# Altium PCB PIPOCPUF_2006.PCBDOC (part 4 of 6)
Units mil, origin at the board's own origin, x right, y up, seen from the top; angles counter-clockwise.
Board outline 8500 x 4525 mil, 2 copper layers (Top Layer, Top, Bottom Layer, Bottom); 345 components, 259 nets, 1116 pads, 603 vias.
Unrouted connection lines stored in the file: 781.
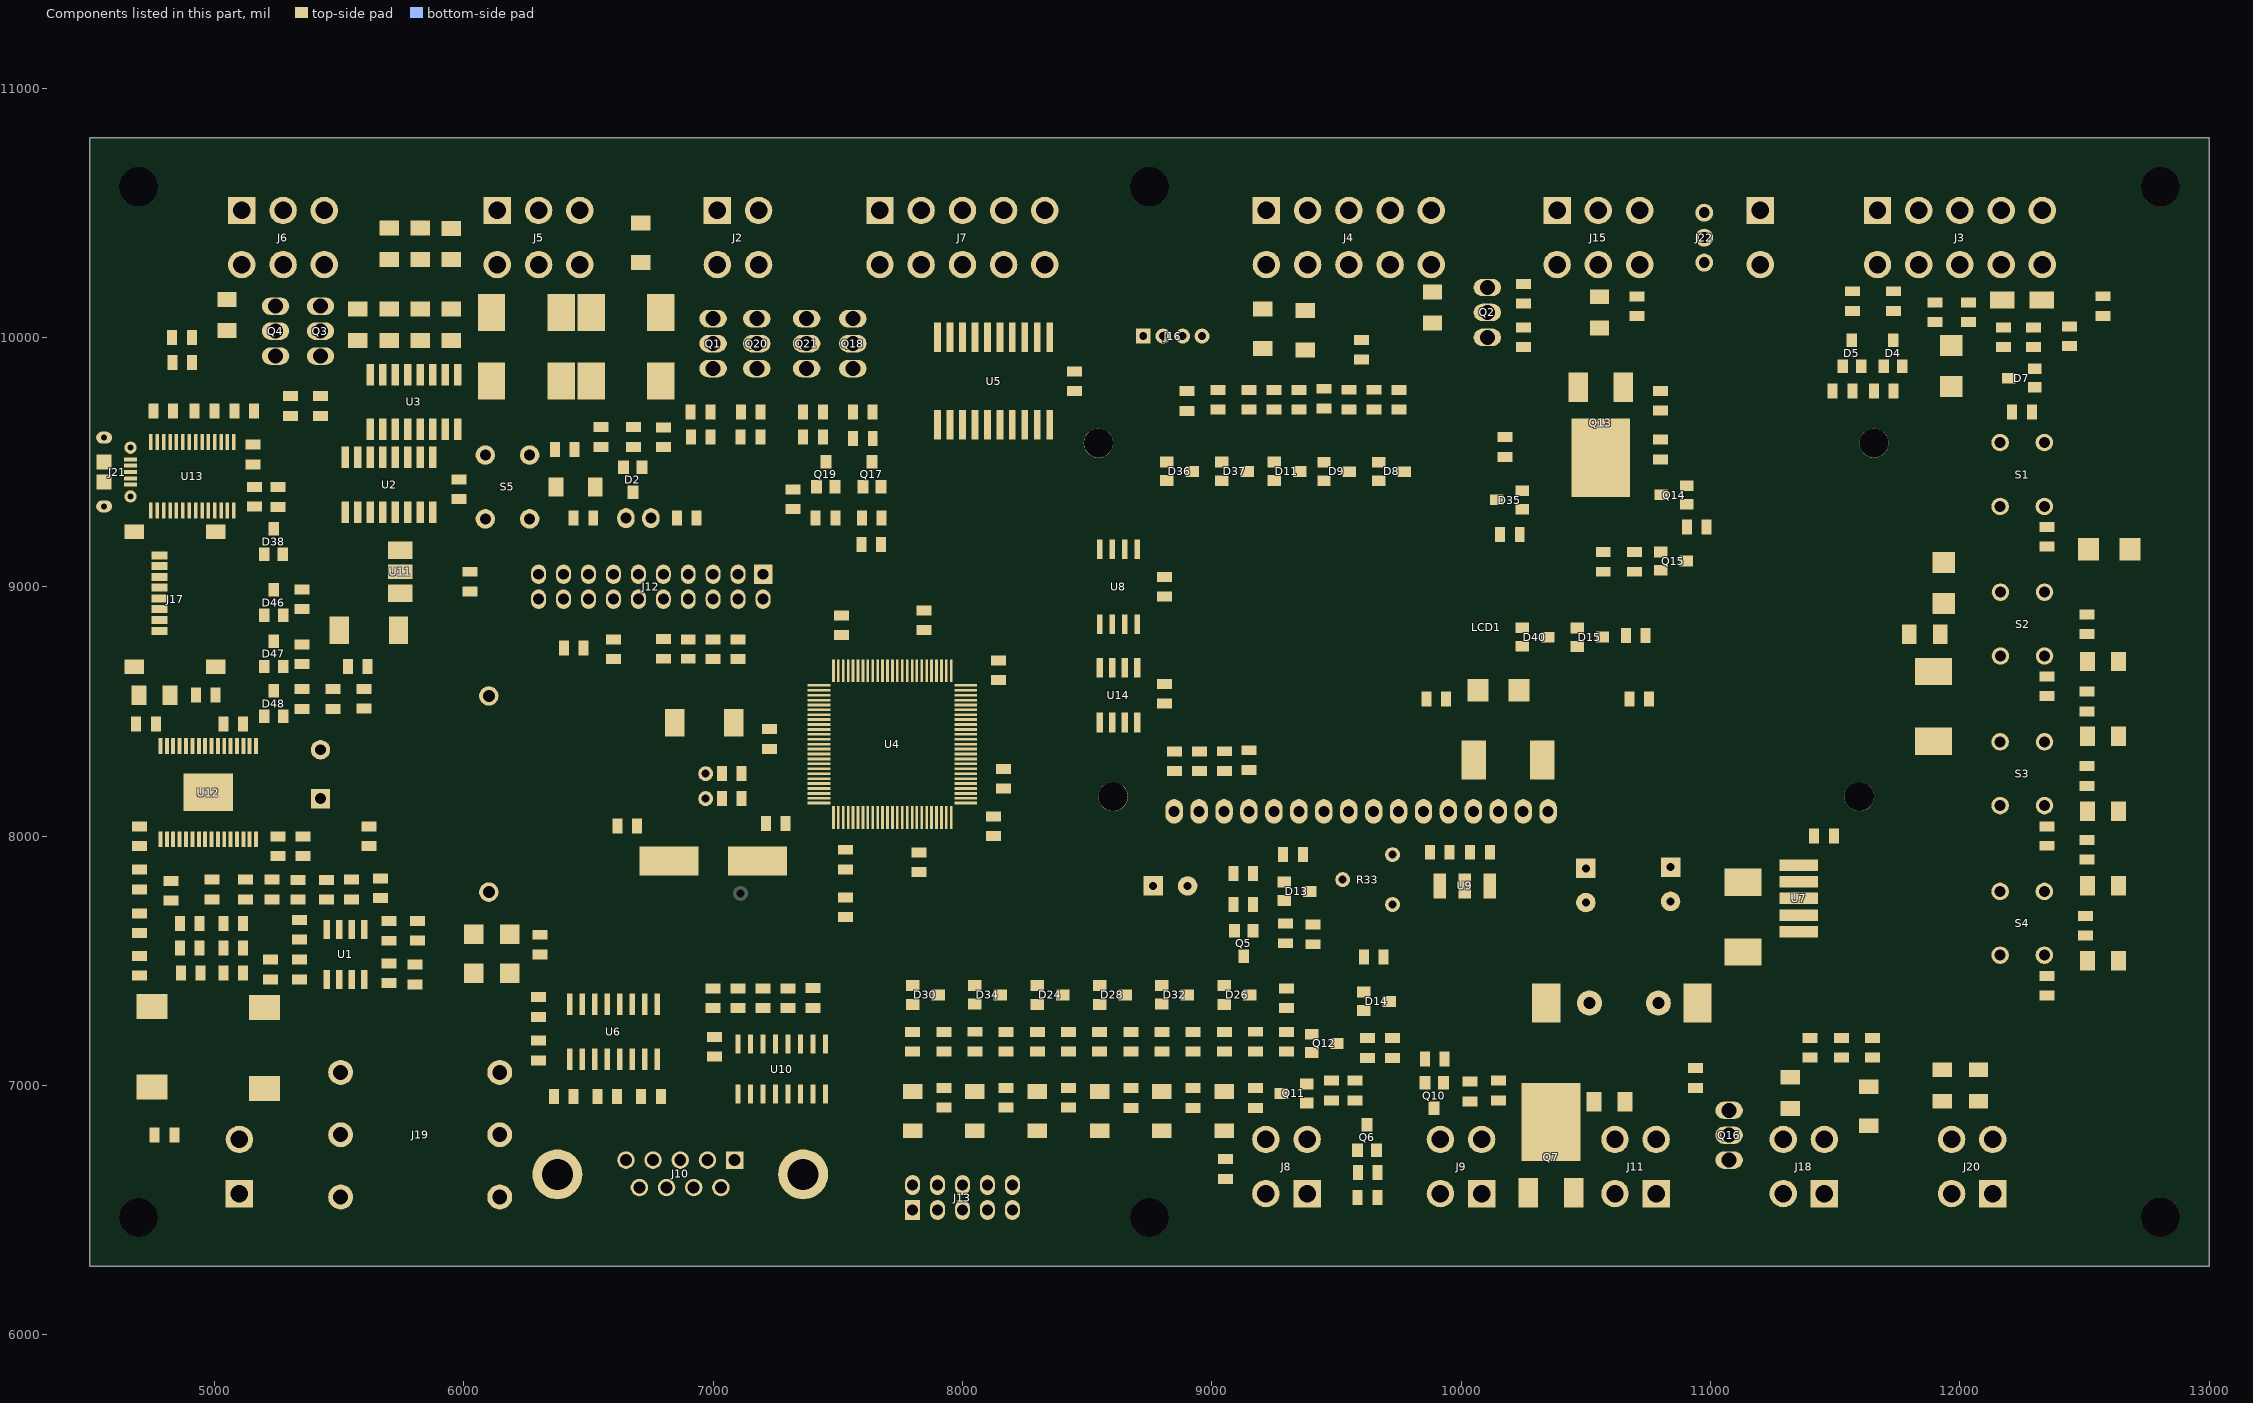
[diagram p4: the components of this part, seen from the top]

## Via types
v1: diameter 28, hole 16, Top Layer, Top to Bottom Layer, Bottom, 595 vias
v2: diameter 36, hole 24, Top Layer, Top to Bottom Layer, Bottom, 4 vias
v3: diameter 40, hole 24, Top Layer, Top to Bottom Layer, Bottom, 4 vias

## Nets (pads, with @x,y where several pads share a name; then routed paths per layer and width w, separated by ;. In a path a pad name is that pad's centre, name@x,y a point inside that pad or via, vN(x,y) a via of type N, cw(c..) or ccw(c..) an arc to the next point about the centre after c; other vN are vias at no path point) (continued)
copper on no net: (continued)
  Top Layer, Top w20: 6039,7800 6041,7808 6066,7833 6100,7842 6133,7833 6158,7808 6160,7800 ; 6144,8445 6144,8514 6158,8528 6167,8562 6158,8595 ; 6158,8595 6144,8609 6144,8807 6151,8791 6336,8606 6336,8501 6335,8501 6314,8495 6299,8480 6293,8460 ; 6160,7800 6301,7800 ; 6160,7800 6301,7800 ; 6293,8460 6299,8439 6301,8436 6301,7800 ; v1@6400,7450 6791,7450 ; v1@6400,7450 6791,7450 ; v1@6400,7450 6400,7503 6405,7509 6408,7519 6410,7518 6430,7524 6445,7539 6451,7560 6450,7562 6464,7549 6485,7543 6505,7549 6520,7564 6526,7585 ; 6526,7585 6520,7605 6518,7608 6518,7808 6616,7711 6640,7701 6906,7701 6911,7696 6911,7450 ; 6641,8298 6646,8296 6659,8265 6659,8092 6660,8093 6674,8096 6714,8096 6727,8093 6737,8083 6740,8070 6740,8058 ; 6641,8298 6643,8300 6942,8300 6941,8300 6919,8278 6912,8250 6919,8221 6940,8200 6919,8178 ; 6656,8730 6656,8690 6653,8676 6643,8666 6639,8665 6641,8660 6635,8639 6620,8624 6618,8623 6573,8578 6573,8439 6582,8447 6610,8458 6780,8458 6780,8510 6783,8523 6793,8533 6807,8536 6885,8536 6898,8533 6908,8523 6911,8510 6911,8415 ; 6656,8730 6653,8743 6647,8749 6653,8755 6656,8769 6656,8803 6676,8823 6687,8850 ; 6687,8850 6687,8886 6700,8883 6710,8885 6702,8865 ; 6702,8865 6702,8740 6713,8713 6742,8684 6745,8682 6746,8677 6756,8667 6770,8664 6816,8664 6816,8653 6814,8650 6808,8630 6814,8609 6829,8594 6850,8588 6870,8594 6885,8609 6891,8630 6900,8628 6911,8631 6908,8620 6914,8599 6929,8584 6950,8578 6970,8584 6985,8599 6991,8620 6988,8631 7000,8628 7004,8629 7009,8614 7024,8599 7045,8593 7065,8599 7080,8614 7085,8632 7100,8628 7120,8634 7132,8645 7134,8644 7155,8638 7173,8643 7174,8639 7189,8624 7206,8619 7206,8515 7216,8491 7231,8475 7195,8475 7187,8473 7164,8473 7155,8476 7148,8474 7148,8510 7145,8523 7135,8533 7122,8536 7044,8536 7030,8533 7020,8523 7017,8510 7017,8415 ; 6740,8058 7086,8058 ; 6740,8058 7086,8058 ; 6791,7450 6791,7476 6789,7479 6783,7500 6789,7520 6804,7535 6825,7541 6845,7535 6860,7520 6866,7500 6860,7479 6858,7476 6858,7450 ; v1(6800,9485) 6800,9545 ; v1(6800,9485) 6800,9545 ; 6800,9545 6800,9550 ; 6800,9545 6800,9550 ; 6858,7450 6911,7450 ; 6858,7450 6911,7450 ; 6911,8415 7017,8415 ; 6911,8415 7017,8415 ; 6919,8178 6912,8150 6915,8136 6910,8138 6886,8128 6876,8105 6886,8081 6896,8071 6920,8061 7075,8061 7098,8071 7120,8093 7086,8058 ; 7033,9643 7066,9643 ; 7033,9643 7036,9630 7036,9570 7033,9556 7023,9546 7010,9543 6970,9543 6956,9546 6950,9552 6952,9546 6946,9525 6944,9522 6950,9520 6965,9505 6971,9485 6968,9475 6968,9349 6978,9325 6978,9312 6980,9305 6980,9284 6988,9265 6988,9114 7000,9116 7028,9109 7050,9088 7071,9109 7100,9116 7128,9109 7138,9099 7139,9102 7149,9112 7161,9115 7161,9200 7158,9210 7164,9230 7177,9244 7161,9261 7151,9285 7151,9550 7149,9552 7143,9546 7130,9543 7090,9543 7076,9546 7066,9556 7063,9570 7063,9630 7066,9643 ; 7033,9643 7028,9647 7028,9653 7032,9656 7035,9670 7035,9730 7032,9743 7028,9746 7028,9750 7074,9750 7067,9743 7064,9730 7064,9670 7067,9656 7073,9650 7066,9643 ; 7041,7450 7155,7450 ; 7041,7450 7155,7450 ; 7041,7450 7035,7470 7020,7485 7000,7491 6979,7485 6978,7485 6978,7710 6970,7730 7070,7730 7081,7719 7110,7712 7138,7719 7149,7730 7335,7730 7336,7731 7336,7530 7346,7506 7372,7479 7364,7470 7358,7450 ; 7155,7450 7164,7470 7168,7481 7179,7485 7200,7494 7220,7485 7231,7481 7235,7470 v1@7244,7450 ; v1@7244,7450 7358,7450 ; v1@7244,7450 7358,7450 ; 7487,9552 7494,9545 7500,9546 7520,9540 7535,9525 7541,9505 7535,9484 7520,9469 7500,9463 7498,9464 7497,9461 7489,9453 7511,9453 7524,9450 7534,9440 7537,9427 7537,9373 7534,9359 7534,9345 7531,9337 7531,9320 7533,9318 7536,9305 7536,9245 7533,9231 7523,9221 7510,9218 7470,9218 7456,9221 7450,9227 7444,9221 7431,9218 7407,9218 7408,9215 7408,8817 7425,8821 7426,8821 7426,9071 7424,9074 7418,9095 7424,9115 7439,9130 7460,9136 7480,9130 7495,9115 7501,9095 7495,9074 7493,9071 7493,8931 7545,8931 7547,8931 7547,9060 7545,9063 7539,9084 7545,9104 7559,9118 7551,9126 7548,9140 7548,9200 7551,9213 7557,9218 7557,9227 7552,9231 7549,9245 7549,9305 7552,9318 7558,9323 7558,9356 7554,9359 7551,9373 7551,9427 7554,9440 7564,9450 7578,9453 7599,9453 7591,9461 7588,9475 7588,9529 7591,9540 7581,9538 7541,9538 7527,9541 7517,9551 7514,9565 7514,9625 7517,9638 7523,9643 7523,9650 7516,9656 7513,9670 7513,9730 7516,9743 7522,9749 7522,9750 7478,9750 7478,9747 7483,9743 7486,9730 7486,9670 7483,9656 7478,9652 7478,9647 7483,9643 7486,9630 7486,9570 7483,9556 7480,9554 7487,9552 ; 8008,9305 8014,9325 8029,9340 8035,9342 7976,9401 7975,9403 7970,9399 7950,9393 7929,9399 7923,9404 7923,8840 7929,8845 7928,8850 7934,8870 7949,8885 7970,8891 7977,8889 7979,8895 7994,8910 8015,8916 8035,8910 8036,8910 8036,9267 8029,9269 8014,9284 8008,9305 ; 8091,7450 8192,7450 ; 8091,7450 8192,7450 ; 8091,7450 8091,7451 8085,7471 8070,7486 8050,7492 8036,7488 8083,7536 8093,7560 8093,7954 8095,7954 8150,7954 8150,7725 8164,7689 8200,7675 8204,7677 8206,7509 8203,7500 8209,7479 8215,7472 8192,7450 ; 8475,7450 8508,7450 ; 8475,7450 8508,7450 ; 8475,7450 8473,7453 8398,7528 8398,7850 8405,7848 8421,7852 8421,7803 8409,7790 8403,7770 8409,7749 8424,7734 8445,7728 8465,7734 8480,7749 8486,7770 8485,7772 8488,7780 ; 8488,7780 8488,7905 8478,7928 8468,7938 8468,7983 8486,7966 8510,7956 8695,7956 8718,7966 8751,7998 8751,7943 8749,7940 8743,7920 8749,7899 8764,7884 8785,7878 8805,7884 8820,7899 8826,7920 8820,7940 8818,7943 8818,8030 8849,8021 8880,8030 8899,8048 8917,8030 8949,8021 8980,8030 8999,8048 9017,8030 9049,8021 9080,8030 9099,8048 9117,8030 9149,8021 9180,8030 9199,8048 9217,8030 9249,8021 9280,8030 9299,8048 9317,8030 9348,8021 9344,8020 9329,8005 9323,7985 9326,7973 9325,7972 9319,7978 9306,7981 9266,7981 9252,7978 9242,7968 9240,7961 9219,7955 9204,7940 9198,7920 9204,7899 9219,7884 9240,7878 9244,7879 9251,7873 9251,7860 9249,7860 9239,7850 9236,7837 9236,7793 9239,7779 9241,7778 9239,7776 9238,7772 9232,7769 9230,7767 9228,7767 9221,7762 9214,7760 9211,7757 9208,7768 9202,7773 9202,7801 9208,7806 9211,7820 9211,7880 9208,7893 9198,7903 9185,7906 9145,7906 9131,7903 9125,7897 9119,7903 9106,7906 9066,7906 9052,7903 9042,7893 9041,7888 9030,7891 9009,7885 8994,7870 8988,7850 8994,7829 9009,7814 9030,7808 9041,7811 9042,7806 9052,7796 9066,7793 9106,7793 9119,7796 9125,7802 9127,7801 9127,7773 9125,7772 9119,7778 9106,7781 9066,7781 9052,7778 9042,7768 9039,7755 9039,7695 9041,7687 9041,7636 9022,7617 9011,7590 9011,7460 9008,7451 9008,7450 ; 8508,7450 8508,7451 8514,7471 8529,7486 8550,7492 8570,7486 8585,7471 8591,7451 8591,7450 ; 8525,9212 8539,9215 8561,9215 8574,9212 ; 8525,9212 8523,9210 8523,9251 8738,9466 8748,9490 8748,9741 8750,9744 8752,9750 8761,9750 8761,9580 8772,9552 8779,9545 8769,9535 8766,9522 8766,9478 8769,9464 8771,9463 8769,9461 8766,9448 8766,9404 8769,9390 8779,9380 8786,9378 8786,9126 8772,9112 8769,9106 8764,9100 8758,9080 8759,9077 8758,9078 8735,9101 8737,9111 8737,9189 8734,9202 8724,9212 ; 8574,9212 8575,9212 ; 8574,9212 8575,9211 8575,9212 ; 8575,9212 8589,9215 8611,9215 8611,9226 8609,9229 8603,9250 8609,9270 8624,9285 8645,9291 8665,9285 8680,9270 8686,9250 8680,9229 8678,9226 8678,9213 8689,9215 8711,9215 8724,9212 ; 8591,7450 8617,7450 ; 8591,7450 8617,7450 ; 8608,7600 8614,7620 8629,7635 8650,7641 8670,7635 8685,7620 8691,7600 ; 8608,7600 8614,7579 8616,7576 8617,7450 ; 8684,7450 8758,7450 ; 8684,7450 8758,7450 ; 8684,7450 8683,7577 8685,7579 8691,7600 ; 8758,7450 8758,7451 8764,7471 8779,7486 8800,7492 8818,7487 8815,7495 ; 8815,7495 8829,7530 8850,7538 8850,7760 8844,7766 8835,7800 8844,7833 8869,7858 8903,7867 8936,7858 8961,7833 8970,7800 8961,7766 8949,7754 8949,7495 ; 8884,9274 8878,9295 8884,9315 8888,9320 8888,9415 8881,9417 8873,9425 8873,9404 8870,9390 8868,9388 8870,9380 8864,9359 8863,9358 8863,9110 8852,9082 8853,9082 8863,9072 8865,9063 8867,9062 8892,9037 8903,9010 8903,8754 8906,8745 8903,8735 8903,8715 8892,8687 8863,8658 8863,8653 8875,8656 8895,8650 8910,8635 8916,8615 8913,8605 8913,8555 8902,8527 8882,8507 8863,8499 8863,8497 8856,8490 8875,8485 8890,8470 8896,8450 8890,8429 8888,8426 8888,8383 8893,8382 8900,8375 8906,8382 8920,8385 8921,8385 8921,8781 8919,8784 8913,8805 8919,8825 8934,8840 8955,8846 8975,8840 8990,8825 8996,8805 8990,8784 8988,8781 8988,8383 8993,8382 8999,8376 9006,8383 9016,8385 9016,8556 9014,8559 9008,8580 9014,8600 9029,8615 9050,8621 9070,8615 9085,8600 9091,8580 9085,8559 9083,8556 9083,8385 9093,8383 9098,8378 9106,8387 9116,8389 9116,8536 9114,8539 ; 8884,9274 8899,9259 ; 8899,9259 8920,9253 8940,9259 ; 8911,7450 9008,7450 ; 8911,7450 9008,7450 ; 8911,7450 8935,7459 8949,7495 ; 8940,9259 8955,9274 ; 8955,9274 8961,9295 8955,9315 8955,9316 8955,9415 8962,9417 8972,9427 8975,9441 8975,9485 8972,9498 8962,9508 8959,9509 8959,9573 8948,9599 8932,9615 8932,9658 8943,9661 8953,9671 8956,9685 8956,9725 8953,9738 8947,9744 8952,9750 8977,9750 8977,9749 8971,9743 8968,9730 8968,9690 8971,9676 8981,9666 8987,9665 8987,9655 8998,9628 9032,9593 9019,9589 9004,9574 ; 9004,9574 8998,9554 9000,9545 8999,9545 8989,9535 8986,9522 8986,9478 8989,9464 8991,9462 8989,9460 8986,9447 8986,9403 8989,9389 8999,9379 9003,9378 9009,9358 9014,9352 9017,9346 9023,9343 9024,9343 9027,9342 9045,9335 9062,9342 9065,9343 9066,9343 9072,9346 9075,9352 9080,9358 9086,9379 ; 9086,9379 9085,9384 9090,9389 9093,9403 9093,9424 9101,9416 9106,9415 9106,9298 9104,9295 9098,9275 9104,9254 9119,9239 9140,9233 9160,9239 9175,9254 9181,9275 9175,9295 9173,9298 9173,9414 9175,9414 9192,9397 9198,9394 ; 9114,8539 9108,8560 9114,8580 9129,8595 9150,8601 9170,8595 9185,8580 9191,8560 9185,8539 ; 9185,8539 9183,8536 9183,8389 9193,8387 9203,8377 9206,8364 9206,8324 9203,8310 9197,8304 9203,8298 9206,8285 9206,8245 9203,8231 9193,8221 9187,8220 9187,8160 9199,8149 9217,8167 9249,8176 9280,8167 9299,8149 9317,8167 9349,8176 9380,8167 9399,8149 9417,8167 9449,8176 9480,8167 9499,8149 9517,8167 9549,8176 9580,8167 9599,8149 9615,8165 9611,8816 9609,8819 9603,8840 9609,8860 9624,8875 9645,8881 9665,8875 9680,8860 9686,8840 9680,8819 9678,8817 9682,8166 9699,8149 9717,8167 9749,8176 9780,8167 9799,8149 9817,8167 9849,8176 9880,8167 9899,8149 9917,8167 9949,8176 9980,8167 9999,8149 9999,8200 9987,8203 9977,8213 9974,8227 9974,8383 9977,8396 9987,8406 10000,8409 10000,8532 9998,8540 9998,8630 10000,8637 10000,9750 9862,9750 9862,9550 9851,9523 9827,9499 9840,9495 9855,9480 9861,9460 9855,9439 ; 9198,9394 9199,9390 9209,9380 9213,9379 ; 9213,9379 9219,9358 9225,9351 9227,9347 9231,9345 9234,9343 9244,9340 9255,9336 9265,9340 9275,9343 9278,9345 9282,9347 9284,9351 9290,9358 9296,9379 ; 9296,9379 9294,9385 9300,9390 9303,9404 9303,9425 9311,9417 9325,9414 9331,9414 9331,8278 9329,8275 9323,8255 9329,8234 9344,8219 9365,8213 9385,8219 9400,8234 9406,8255 9400,8275 9398,8278 9398,9394 9399,9390 9409,9380 9413,9379 ; 9413,9379 9413,9378 9419,9357 9425,9350 9427,9346 9431,9344 9434,9342 9444,9339 9455,9335 9465,9339 9475,9342 9478,9344 9482,9346 9484,9350 9490,9357 9496,9378 9494,9384 9500,9390 9503,9404 9503,9425 9511,9417 9525,9414 9579,9414 9592,9417 9597,9422 9616,9403 9619,9390 9629,9380 9633,9379 ; 9427,7825 9467,7825 ; 9427,7825 9427,7824 9432,7823 9442,7813 9445,7800 9445,7756 9442,7742 9432,7732 9427,7731 9427,7730 9431,7726 9442,7700 9442,7689 9448,7688 9458,7678 9461,7665 9461,7625 9458,7611 9452,7605 9458,7599 9461,7586 9461,7546 9458,7532 9448,7522 9447,7522 9447,7450 ; 9427,7825 9416,7851 9402,7865 9402,7876 9408,7881 9411,7895 9411,7955 9408,7968 9403,7973 9406,7985 9400,8005 9385,8020 9365,8026 9380,8030 9399,8048 9417,8030 9449,8021 9480,8030 9499,8048 9517,8030 9549,8021 9580,8030 9599,8048 9617,8030 9649,8021 9680,8030 9696,8045 9696,7975 9674,7953 9667,7925 9674,7896 9696,7874 9725,7867 9753,7874 9767,7887 9767,7848 9763,7835 9769,7814 9770,7812 9764,7805 9758,7785 9763,7765 9753,7775 9725,7782 9696,7775 9674,7753 9667,7725 9674,7696 9696,7674 9725,7667 9733,7669 9733,7552 9732,7558 9722,7568 9718,7569 9718,7611 9720,7614 9726,7635 9720,7655 9705,7670 9685,7676 9664,7670 9649,7655 9643,7635 9649,7614 9651,7611 9651,7564 9649,7562 9643,7568 9630,7571 9593,7571 9593,7726 9618,7751 9628,7775 9628,7956 9630,7959 9636,7980 9630,8000 9615,8015 9595,8021 9574,8015 9559,8000 9553,7980 9559,7959 9561,7956 9561,7867 9553,7875 9525,7882 9496,7875 9474,7853 9467,7825 ; 9447,7450 9526,7450 ; 9447,7450 9526,7450 ; 9467,7825 9474,7796 9496,7774 9525,7767 9544,7772 9536,7763 9526,7740 9526,7450 ; 9633,9379 9633,9378 9639,9357 9645,9350 9647,9346 9651,9344 9654,9342 9664,9339 9675,9335 9685,9339 9695,9342 9698,9344 9702,9346 9704,9350 9710,9357 9716,9378 9714,9384 9720,9390 9723,9404 9723,9425 9731,9417 9745,9414 9799,9414 9812,9417 9814,9419 9820,9418 9840,9424 ; 9824,8629 9818,8650 9824,8670 9839,8685 9860,8691 9880,8685 9895,8670 9901,8650 9895,8629 ; 9824,8629 9826,8626 9826,8602 9817,8593 9814,8580 9814,8520 9817,8506 9827,8496 9841,8493 9881,8493 9894,8496 9900,8502 9906,8496 9906,8443 9904,8440 9898,8420 9904,8399 9919,8384 9940,8378 9960,8384 9975,8399 9981,8420 9975,8440 9973,8443 9973,8496 9983,8506 9986,8520 9986,8580 9983,8593 9973,8603 9960,8606 9920,8606 9906,8603 9900,8597 9894,8603 9893,8603 9893,8626 9895,8629 ; 9840,9424 9855,9439 ; 9851,7735 9839,7705 9816,7682 9816,7531 9835,7536 9855,7530 9870,7515 9876,7495 ; 9851,7735 9867,7735 9876,7726 9890,7723 9940,7723 9953,7726 9959,7733 9959,7465 ; 9875,7450 9966,7450 ; 9875,7450 9966,7450 ; 9875,7450 9876,7455 9871,7475 9876,7495 ; 9959,7465 9966,7450 ; 10191,9406 10194,9419 10201,9425 10198,9435 10204,9455 10219,9470 10240,9476 10260,9470 10275,9456 10276,9459 10276,9545 10273,9555 10279,9575 10294,9590 10315,9596 10335,9590 10350,9575 10356,9555 10353,9545 10353,9459 10356,9450 10353,9440 10353,9370 10356,9365 10353,9359 10353,9355 10351,9348 10351,9341 10351,9340 10345,9319 10340,9313 10339,9310 10336,9309 10330,9304 10315,9299 10297,9282 10295,9275 10295,9120 10279,9080 10225,9027 10225,8921 10245,8926 10265,8920 10280,8905 10286,8885 10284,8879 10285,8879 10295,8869 10298,8856 10298,8834 10306,8842 10320,8845 10374,8845 10387,8842 10397,8832 10400,8819 10400,8777 10397,8763 10387,8753 10378,8751 10378,8748 10425,8701 10423,8710 10425,8715 10424,8715 10414,8725 10411,8739 10411,8783 10414,8796 10416,8798 10414,8799 10411,8813 10411,8857 10414,8870 10424,8880 10423,8885 10429,8905 10444,8920 10465,8926 10485,8920 10500,8905 10506,8885 10505,8880 10515,8870 10518,8857 10518,8835 10526,8843 10530,8844 10528,8850 10534,8870 10536,8873 10536,9014 10526,9016 ; 10191,9406 10191,9384 10183,9392 10180,9393 10180,9432 10201,9453 10211,9475 10218,9477 10228,9487 10231,9501 10231,9541 ; 10231,9541 10228,9554 10222,9560 10228,9566 10231,9580 10231,9620 10228,9633 10218,9643 10212,9644 10212,9744 10218,9750 10403,9750 10403,9741 10406,9727 10416,9717 10430,9714 10499,9714 10499,9700 10442,9700 10428,9697 10418,9687 10415,9674 10415,9360 10418,9346 ; 10418,9346 10428,9336 10442,9333 10678,9333 10691,9336 10701,9346 ; 10526,9016 10516,9026 10513,9040 10513,9080 10516,9093 10522,9099 10516,9105 10513,9119 10513,9159 10516,9172 10526,9182 10540,9185 10600,9185 10613,9182 10618,9176 10646,9176 10651,9182 10665,9185 10725,9185 10738,9182 10742,9177 10752,9177 10759,9185 10773,9188 10827,9188 10840,9185 10850,9175 10853,9162 10853,9140 10861,9148 10864,9149 10864,9195 10862,9196 ; 10701,9346 10704,9360 10704,9674 10701,9687 10691,9697 10678,9700 10610,9700 10610,9714 10611,9714 10689,9714 10702,9717 10705,9720 10744,9682 10746,9672 10756,9662 10762,9661 10762,9634 10756,9633 10746,9623 10743,9610 10743,9570 10746,9556 ; 10746,9556 10752,9550 10746,9544 10743,9531 10743,9491 10746,9477 10756,9467 10765,9465 10765,9413 10762,9412 10752,9402 10749,9389 10749,9347 10752,9333 10762,9323 10776,9320 10830,9320 10843,9323 10851,9331 10851,9309 10854,9295 10864,9285 10862,9283 10859,9270 10859,9210 10862,9196 ; v1@10905,9445 v1(10905,9450) ; v1@10905,9445 v1(10905,9450) ; 10952,9138 10955,9125 10955,9081 10952,9067 10942,9057 10929,9054 10875,9054 10861,9057 10853,9065 10853,9044 10850,9030 10840,9020 10838,9020 10838,8894 10841,8885 10835,8864 10820,8849 10800,8843 10783,8848 10786,8835 10786,8775 10783,8761 10773,8751 10773,8640 10763,8616 10754,8606 10774,8606 10787,8603 10797,8593 10800,8580 10800,8520 10797,8506 10787,8496 10787,8074 10777,8050 10753,8025 10770,8020 10785,8005 10791,7985 10785,7964 10783,7961 10783,7933 10787,7937 10801,7940 10879,7940 10892,7937 10902,7927 10905,7914 10905,7836 10902,7822 10892,7812 10879,7809 10801,7809 10787,7812 10783,7816 10783,7773 10806,7796 10840,7805 10873,7796 10887,7782 10891,7794 10946,7854 10947,7855 10948,7856 10970,7865 10992,7875 10993,7875 10995,7876 11030,7876 11032,7882 11042,7892 11055,7895 11204,7895 11217,7892 11227,7882 11230,7871 11249,7871 11249,7906 11252,7919 11262,7929 11273,7932 11273,8245 11293,8291 11423,8421 11470,8441 11576,8441 11576,8552 11575,8577 11573,8585 11575,8590 11559,9324 11538,9333 ; 10952,9138 10942,9148 10940,9148 10941,9188 10945,9192 10951,9186 10965,9183 11005,9183 11018,9186 11028,9196 11031,9210 11031,9270 11028,9283 11023,9287 11023,9750 11157,9750 11146,9738 ; 11006,7450 11600,7450 ; 11006,7450 11600,7450 ; 11006,7450 11006,7562 11010,7560 11028,7568 11028,7480 ; 11028,7480 11032,7466 11042,7456 11055,7453 11204,7453 11217,7456 11227,7466 11231,7480 ; 11146,9738 11136,9715 11136,8228 11134,8225 11128,8205 11134,8184 11149,8169 11170,8163 11181,8166 11181,8043 ; 11181,8043 11179,8040 11173,8020 11179,7999 11194,7984 11215,7978 11235,7984 11250,7999 11256,8020 11250,8040 11248,8043 ; 11231,7480 11231,7518 11273,7560 11597,7560 11600,7450 ; 11248,8043 11248,8501 11260,8498 11271,8501 11271,8488 11269,8485 11263,8465 11269,8444 11284,8429 11305,8423 11325,8429 11340,8444 11346,8465 11340,8485 11338,8488 11338,9533 11538,9333 ; v1(6900,8670) 6900,8711 v1(6900,8670) ; v1(7000,8670) 7000,8710 v1(7000,8670) ; 8699,7761 8699,7839 8702,7852 8712,7862 8726,7865 8804,7865 8817,7862 8827,7852 8830,7839 8830,7761 8827,7747 8817,7737 8804,7734 8726,7734 8712,7737 8702,7747 8699,7761
  Top Layer, Top w24: v1(6225,6860) 6225,7160 6250,7185 6295,7185 ; v1(6300,7445) 6300,7530 ; v1(7010,7060) 7010,7115 ; 7450,6990 v1(7500,6990) ; 7490,9280 v1@7490,9340 ; 7675,9290 v1(7675,9345) ; v1(8350,9345) 8350,9640 ; 9250,9540 v1(9250,9555) 9250,9710 ; v1@9450,9560 9450,9710 ; 9610,7390 v1(9610,7455) 9610,7515 9610,7525 ; v1(9775,7360) 9775,7700 9810,7735 v1@9810,7780 ; v1(10310,9340) 10310,9350 10310,9360 10315,9365 ; v1(10570,7800) v1(10570,8710) ; 11645,7200 11645,7610
  Top Layer, Top w30: v1(4560,8530) v1(4560,8570) 4690,8570 ; v3@4570,9330 4635,9330 4665,9360 v2@4670,9360 ; v2@4675,9365 4700,9365 4715,9380 4715,9409 4715,9410 v1@4880,9410 ; 4685,8690 4685,9215 ; 4685,9225 4685,9215 ; 4690,8680 5190,8680 ; 4695,9040 4770,9040 ; 4820,9520 5000,9520 ; 5200,9125 5195,9125 5155,9125 5065,9215 4965,9215 4945,9195 4899,9195 4780,9195 4760,9215 4685,9215 ; 5255,9405 v1(5255,9520) ; 5490,8595 5490,8635 5525,8670 5525,8790 5510,8805 5510,8825 5625,8940 5625,9095 5685,9155 5725,9155 ; v1(5605,8445) 5605,8500 ; 5610,8600 5610,8675 5735,8800 5735,8980 ; v1(5930,7450) v1(5930,8445) ; 5975,9625 5975,9435 6025,9435 5980,9445 v1(6040,9445) 6085,9400 6085,9375 6085,9280 ; v1(6100,8445) 6100,8562 v1(6100,8950) 6100,9265 ; v1(6180,7320) 6180,7405 ; 6535,9385 v1(6590,9385) ; 6595,8285 6595,8315 6625,8345 7000,8345 7105,8345 v1(7150,8345) ; 6615,8265 6615,7985 6670,7930 6670,7815 6710,7775 7335,7775 7335,7780 v1(7335,7825) v1(7335,8090) ; 6800,8795 6800,8940 ; 7120,8235 v1(7160,8235) ; 7200,7400 v1(7200,7450) ; v1(7490,9345) 7490,9400 ; v1(7535,7825) 7535,7860 7535,7865 ; v1(7675,9345) 7675,9390 ; v1(7705,6860) 7705,6535 7740,6500 7800,6500 ; 8725,10005 v1(8725,10230) ; 9895,7785 9805,7785 9805,7780 9900,7780 ; v1(10350,7645) v1(10350,7690) ; v1(11010,7605) 11010,7650 11040,7680 11180,7680 11335,7680 ; 11350,8005 11400,8005 ; 11500,7985 11600,7985 11675,7910 ; 12195,10040 12290,10040 ; 12305,9880 12305,9940 ; 12335,10160 12335,10285 ; 12355,10135 12415,10075 12415,10045
  Top Layer, Top w40: v1(5930,7405) v1(5930,7450) ; 8165,8190 8165,8135 8200,8100 8200,8035 v1(8200,7725) ; v1(8865,7495) v1@8890,7495 ; v1(8900,7495) 8900,7800 ; v1@9170,6865 9125,6865 9125,6645 9200,6570 ; 9720,10505 9720,10555 9770,10605 9955,10605 9990,10570 9990,9890 10050,9830 10050,8340 ; 9865,7915 9860,7910 9860,7805 9910,7805 ; 10045,8105 10045,8055 10115,7985 10115,7825 10115,7795 ; 10049,8099 10049,8269 10050,8305 ; 10115,7775 10115,7760 10145,7730 v1(10195,7730) ; v1@10195,7735 v1(10195,7765) 10195,7795 ; 7560,8210 7875,8210 7875,8525 7560,8525 7560,8210 ; v1@7610,8260 7825,8260 7825,8475 7610,8475 v1@7610,8260
  Top Layer, Top w50: 4705,8150 5250,8150 ; 4710,8195 5260,8195 ; 4710,8240 5013,8240 5265,8240 ; 4735,8110 5014,8110 5240,8110 ; 5270,8065 5167,8065 5014,8065 4937,8065 4783,8065 4780,8065 4745,8100 4690,8100 4690,8285 4783,8285 4834,8285 4962,8285 5013,8285 5116,8285 5167,8285 5270,8285 ; 5295,8065 5295,8275 5295,8285 ; v1(5435,7885) 5435,8110 ; v1(9730,10060) 9875,10060 ; 9745,8095 9745,8185 ; 9865,10185 9865,10280 ; 9960,7935 10015,7935 ; v1(10005,9885) 10005,9880 v1(10035,9850) ; 10015,7465 10015,7795 ; 10015,7658 10015,7801 ; 10015,7820 10015,7935 ; 10020,7935 10015,7935 ; 10130,10225 10250,10225 ; 10175,7545 10250,7620 v1(10250,7930) 10250,8100 ; 10240,9285 10240,9120 10170,9050 10170,8715 10215,8670 10215,8530 10215,8165 10245,8135 10245,8105 ; 10390,6935 10525,6935 ; v1(10445,9885) v1@10490,9885 ; 10470,9845 10470,9880 ; v1(10500,7450) 10500,7715 ; 10555,9640 10555,10025 ; 10560,10160 10560,10255 ; 10630,6780 10630,6835 10665,6870 10665,6940 ; 10705,10175 10705,10290 ; v1(10795,7450) 10795,7695 10830,7730 ; 10975,10300 11015,10300 11200,10485 ; 11065,6800 11140,6800 11195,6855 11195,6995 11230,7030 11315,7030 ; 11070,6395 11070,6705 ; 11116,7816 11354,7816 ; 11170,7535 11251,7616 11354,7616 11701,7616 ; 11305,6790 11305,6905 ; 11340,7750 11354,7750 11835,7750 ; 12025,7940 12050,7940 ; 12050,7740 12050,7940 ; 12075,7940 12050,7940 ; v1@12090,7695 12090,7825 12090,8720 ; 12095,8120 12160,8120 ; v1@12105,7625 12165,7565 12165,7525 ; 12155,9315 12090,9250 12090,8720 ; 12165,8720 12090,8720 ; 12650,8705 12650,9050 12675,9075 12675,9160 ; 12685,9155 12820,9155
  Top Layer, Top w70: 5040,10025 5245,10025 ; 5050,10170 4995,10225 4995,10325 5065,10395 5120,10395 5200,10395 5270,10465 5270,10510 ; 5115,10265 5255,10125 5425,10125 ; 5275,8255 5295,8275 5365,8345 5425,8345 ; 5430,10025 5495,10025 5535,9985 5570,9985 ; 5435,10510 5570,10375 5570,10115 ; 5950,10450 6012,10512 6150,10512 ; 5962,10300 6125,10137 ; 6100,9838 6100,10062 ; v1@6100,9962 v1@6175,9962 ; 6387,9812 6387,9725 6525,9725 6525,9837 ; 6387,10087 6387,9962 6525,9962 6525,10075 ; 6800,9837 6800,10680 ; 7010,10515 7010,10450 6900,10340 6900,9995 6925,9975 7170,9975 ; 7165,10075 7165,10290 ; 7185,10505 7185,10445 7285,10345 7285,10190 7275,10180 7275,9990 ; 7275,9995 7295,9975 7560,9975 ; 9915,6435 9915,6570 ; 10345,7340 10345,7775 10440,7870 10510,7870 ; 10360,7335 10505,7335 ; 10450,6430 10450,6535 ; 10620,6405 10620,6565 ; 10790,7330 10940,7335 10940,7660 10940,7750 10995,7810 11110,7810 11090,7800 ; 11200,10290 11335,10425 11335,10665 ; 11295,6395 11295,6565 ; 11340,7905 11340,8245 11470,8375 11865,8375 ; 11670,10470 11385,10185 11385,9580 11585,9380 11695,9380 11795,9280 11795,8805 ; 11930,8660 11930,8935 ; 11930,9105 11930,9245 12010,9325 12170,9325 12170,9395 12225,9450 12825,9450 ; 11965,6385 11965,6560
  Top Layer, Top w90: 10100,10210 10100,10690 ; 10550,10480 10715,10315 10715,10285 ; 12010,7575 12055,7575 12085,7605 12085,7670 12015,7740
  Top Layer, Top w120: v1@4690,10280 v1(4700,10280) v1(4740,10280) v1(4780,10280) 4785,10280 4965,10460 4965,10620 ; 4965,10625 5040,10700 7835,10700 ; v1(7335,10580) 7335,10660 ; v1@7340,10575 7430,10575 7430,10665 ; 7835,10515 7835,10700 ; 9040,10515 9040,10425 8915,10325 8625,10325 8465,10460 8465,10610 8350,10700 7835,10700 ; 9045,10525 9045,10700 9175,10700 9585,10700 ; 9384,10509 9384,10694 ; 9550,10509 9550,10690 ; 9635,10700 10545,10700 ; 10545,10515 10545,10700 ; 10645,10700 10650,10700 ; 11830,10510 11830,10615 11745,10700 10650,10700 ; 10545,10700 10650,10700
  Top Layer, Top w140: 9195,6540 9195,6445 9255,6385 11965,6385 12410,6385 12510,6485 12510,6605 12865,6960 12865,10130 12500,10495 12500,10585 12400,10685 11925,10685 11835,10595 11835,10525
  Bottom Layer, Bottom w10: v1(4835,9000) 5160,9000 5195,9035 v1(5235,9035) v1(5350,9035) 5640,9035 5650,9025 5820,8855 6640,8855 6680,8815 7940,8815 7945,8810 v1(7950,8810) ; v1(4835,9075) 4860,9075 v1(5235,9075) 5635,9075 5645,9065 5835,8875 6650,8875 6690,8835 7925,8835 7940,8850 v1(7970,8850) ; v1(4840,8915) 4920,8915 5005,8830 v1(5240,8830) v1(5350,8830) ; v1(4850,8865) 4925,8865 5160,8630 v1(5240,8630) v1(5345,8630) 5430,8715 7435,8715 7515,8795 7900,8795 7910,8785 v1(7920,8785) ; v1(4855,8635) 4890,8600 5375,8600 5465,8690 5970,8690 6470,8690 6490,8670 v1(6500,8670) ; v1(4860,9245) 4890,9245 4895,9250 v1(5110,9250) ; v1(4940,9110) 5275,9110 5290,9095 5645,9095 5845,8895 6660,8895 6700,8855 7910,8855 7935,8880 8000,8880 8005,8875 v1(8015,8875) ; v1(5250,9680) 5300,9680 5435,9680 5465,9650 5605,9650 v1(7790,9650) ; v1(5395,8460) 5490,8460 5540,8410 5615,8410 v1(5650,8375) ; v1(5480,9685) 5485,9685 5585,9685 5600,9670 5610,9670 7755,9670 7770,9685 v1(7855,9685) ; v1(5625,9710) 6160,9710 v1(6175,9700) v1@6170,9700 ; v1(5675,9750) 5690,9735 6195,9735 6210,9735 v1(6220,9725) ; v1(5795,7735) 5910,7735 6085,7560 6290,7560 6350,7500 6800,7500 v1(6825,7500) ; v1(5895,8495) v1(7345,8495) ; v1(5970,7765) 6000,7765 6120,7645 7675,7645 v1(7690,7630) ; v1(6000,7720) 6100,7620 6450,7620 7650,7620 7660,7610 v1(7660,7605) ; v1(6045,7925) 6060,7910 v1(6485,7910) ; v1(6075,7335) 6135,7395 v1(6775,7395) ; 6144,7052 6145,7055 6175,7055 6250,7055 6280,7025 v1(6725,7025) ; v1(6335,8460) 6350,8460 6360,8470 7260,8470 7345,8385 7345,8270 7315,8240 v1(7265,8240) ; v1(6370,7530) 9865,7530 9890,7505 11825,7500 v1(11840,7485) ; v1(6410,7560) 6420,7550 9875,7550 9900,7525 11870,7525 11895,7500 11910,7500 v1(12075,7500) ; v1(6435,8340) 6585,8340 6645,8400 7155,8400 7255,8300 v1(7310,8300) ; v1(6485,7585) v1(7575,7585) ; v1(6595,8825) 6640,8780 v1(7425,8780) ; v1(6625,7245) 6775,7095 7040,7095 v1(7100,7035) ; v1@6670,7255 v1(6675,7255) 6730,7200 6740,7190 7365,7190 v1(7405,7230) ; 6700,9050 6700,9090 6720,9110 7450,9110 7460,9100 v1(7460,9095) ; v1(6725,9375) 6755,9375 6860,9270 v1(7720,9270) ; v1(6735,7250) 6840,7250 6940,7250 6980,7210 7180,7210 v1(7200,7230) ; v1@6775,7015 6775,6990 6815,6950 7280,6950 7300,6930 v1(7300,6900) ; v1(6775,7020) 6785,7010 ; v1(6850,8630) 6900,8580 7285,8580 v1(7335,8535) v1@7330,8535 ; v1(6930,6900) v1(7150,6900) ; v1(6940,7145) 7125,7145 7160,7110 v1(7160,7090) ; v1(6950,8620) 6965,8605 7085,8605 7310,8605 7325,8590 v1(7335,8580) v1@7330,8580 ; v1(7045,8635) 7055,8630 v1(7340,8630) ; v1(7155,8680) 7165,8690 7440,8690 7465,8665 7465,8585 7465,8570 v1(7505,8530) ; v1(7200,7035) v1(7510,7035) ; v1(7210,8660) 7250,8665 7355,8665 7375,8645 7375,8265 7305,8200 v1(7265,8200) ; v1(7220,9385) 7225,9380 8770,9380 8805,9415 9355,9415 9355,9410 10135,9410 10225,9500 11325,9500 11425,9400 11975,9400 12045,9470 12195,9470 v1(12245,9520) ; v1(7250,7095) 7275,7070 v1(7590,7070) ; v1(7260,8160) 7300,8160 7410,8265 v1(7410,8645) ; v1(7265,9415) 7275,9400 8745,9400 8785,9440 9800,9440 v1(9820,9460) ; v1(7360,9470) 8110,9470 8135,9445 v1(8400,9445) ; v1(7400,7100) 7400,7160 7415,7175 v1(7855,7175) ; v1(7450,7865) 7455,7860 v1(7955,7860) ; v1(7460,7315) v1(8450,7315) ; v1(7460,7365) 7465,7365 7475,7365 7505,7365 7525,7385 8850,7385 8865,7370 9025,7370 9035,7380 9190,7380 v1(9195,7400) ; v1(7460,7950) 7990,7950 8050,7890 v1(8405,7890) ; v1(7480,7405) 8920,7405 v1(8965,7405) ; v1(7485,7985) 7505,7985 7520,7970 7910,7970 8020,7970 8060,7930 8065,7925 8670,7925 8695,7950 9670,7950 9690,7970 10420,7970 10425,7975 10740,7975 ; v1(7500,8590) 7505,8610 7555,8660 8550,8660 8565,8650 v1(9860,8650) ; v1(7505,8470) 7515,8460 7515,8125 7525,8115 ; v1(7505,8730) 7505,8700 7525,8680 8885,8680 10190,8680 10210,8680 10230,8660 10655,8660 v1(10660,8655) v1@10660,8650 ; 7520,8120 7525,8115 ; v1(7530,8565) 7560,8535 ; v1(7550,8000) v1(8060,8000) ; v1(7550,8145) 7550,8125 7565,8110 v1(8280,8110) ; v1(7575,7825) 7580,7830 8555,7830 8655,7830 8710,7890 8830,7890 8840,7900 9075,7900 9095,7880 9675,7880 9690,7870 10365,7870 10445,7950 10810,7950 10880,8020 v1(11215,8020) ; v1(7581,9084) v1(8344,9084) ; v1(7585,7770) 7595,7770 7605,7760 8435,7760 v1(8445,7770) ; v1@7590,8170 7590,8210 7590,8215 ; 7590,8240 7845,8240 ; 7590,8245 7845,8245 ; 7590,8250 7845,8250 ; 7590,8255 7845,8255 ; 7590,8260 7845,8260 ; 7590,8265 7845,8265 ; 7590,8270 7845,8270 ; 7590,8275 7845,8275 ; 7590,8280 7845,8280 ; 7590,8285 7845,8285 ; 7590,8290 7845,8290 ; 7590,8295 7845,8295 ; 7590,8300 7845,8300 ; 7590,8305 7845,8305 ; 7590,8310 7845,8310 ; 7590,8315 7845,8315 ; 7590,8320 7845,8320 ; 7590,8325 7845,8325 ; 7590,8330 7845,8330 ; 7590,8335 7845,8335 ; 7590,8340 7845,8340 ; 7590,8345 7845,8345 ; 7590,8350 7845,8350 ; 7590,8355 7845,8355 ; 7590,8360 7845,8360 ; 7590,8365 7845,8365 ; 7590,8370 7845,8370 ; 7590,8375 7845,8375 ; 7590,8380 7845,8380 ; 7590,8385 7845,8385 ; 7590,8390 7845,8390 ; 7590,8395 7845,8395 ; 7590,8400 7845,8400 ; 7590,8405 7845,8405 ; 7590,8410 7845,8410 ; 7590,8415 7845,8415 ; 7590,8420 7845,8420 ; 7590,8425 7845,8425 ; 7590,8430 7845,8430 ; 7590,8435 7845,8435 ; 7590,8440 7845,8440 ; 7590,8445 7845,8445 ; 7590,8450 7845,8450 ; 7590,8455 7845,8455 ; 7590,8460 7845,8460 ; 7590,8465 7845,8465 ; 7590,8470 7845,8470 ; 7590,8475 7845,8475 ; 7590,8480 7845,8480 ; 7590,8485 7845,8485 ; 7590,8490 7845,8490 ; v1(7590,8590) 7590,8620 7610,8640 8520,8640 8585,8570 ; v1(7615,7585) 7630,7570 7910,7570 7920,7580 v1(7930,7580) ; v1(7615,9055) 8515,9055 8525,9045 v1(12230,9045) ; v1@7645,8570 v1(7640,8570) 7640,8610 7650,8620 8500,8620 8570,8550 9145,8550 v1(9150,8560) ; v1(7645,8760) 7645,8715 7660,8700 7675,8700 7805,8700 8860,8700 10225,8700 10245,8680 10610,8680 10615,8685 12060,8685 12085,8660 12295,8660 12345,8710 ; v1(7665,9025) v1(8420,9025) ; v1(7690,8740) 7710,8720 8575,8720 8635,8775 v1(12415,8775) ; v1(7699,8589) 7704,8589 7715,8600 7975,8600 7995,8600 8055,8540 8510,8540 8540,8510 11340,8510 11345,8505 v1(12230,8505) ; v1(7710,6905) 9435,6905 v1(9500,6840) ; v1(7735,7615) 7765,7615 7770,7620 7975,7620 7990,7620 8010,7600 8080,7600 8245,7600 8250,7605 8280,7630 8675,7630 8700,7605 v1(10645,7605) ; v1(7735,7790) 7745,7805 8580,7805 8665,7805 8720,7865 9015,7865 v1(9030,7850) ; v1(7740,8975) 8640,8975 8665,8950 10905,8950 10955,8900 12435,8900 12445,8900 v1(12455,8890) ; v1(7745,7350) 7755,7360 8835,7360 8845,7350 9050,7350 9060,7360 9325,7360 v1(9355,7390) ; v1(7760,8935) 7775,8935 7785,8945 8245,8945 8285,8905 8310,8880 8795,8880 8810,8865 9620,8865 v1(9645,8840) ; v1(7770,8165) 7770,8200 ; v1(7830,8160) 7850,8160 7885,8160 ; 7830,8540 v1@7830,8565 ; v1(7870,8570) 7875,8570 7880,8575 7885,8580 7935,8580 7950,8565 7950,8545 7910,8505 7910,8470 7920,8460 8845,8460 v1(8855,8450) ; v1(7870,8755) 7880,8755 7895,8740 8560,8740 8630,8805 v1(8955,8805) ; 7880,8535 7895,8550 v1(7910,8550) ; 7885,8225 v1(7920,8225) ; v1(7925,8395) 8530,8395 v1(8550,8375) 8565,8360 8720,8360 v1(8735,8375) ; v1(7935,8155) 7960,8155 7995,8190 v1(8330,8190) ; v1(7935,8270) 7935,8275 7945,8285 8490,8285 8510,8305 8695,8305 v1(8725,8275) ; v1(7940,8355) 7945,8350 8205,8350 8220,8365 v1(8500,8365) ; v1(7940,8490) 7940,8500 7950,8510 8500,8510 8520,8490 11280,8490 v1(11305,8465) ; v1(7950,9435) v1(8040,9435) ; v1(7975,7585) 7980,7580 7985,7575 8010,7575 8215,7575 8220,7570 8775,7570 8785,7580 v1(10605,7575) ; v1(7975,7900) 7985,7900 8015,7870 8030,7855 8620,7855 8640,7855 8705,7920 ; v1(8025,7640) 8025,7635 8030,7640 8045,7640 8055,7650 8720,7650 8730,7640 8735,7635 v1(9685,7635) ; v1(8050,9305) 8910,9305 v1(8920,9295) ; v1@8051,8055 v1(8050,8055) 8080,8055 8180,7955 8665,7955 8680,7970 ; v1(8090,8140) 8315,8140 8335,8140 8445,8030 v1(8470,8030) ; v1(8100,8250) 8265,8250 8275,8260 8355,8260 v1(8370,8250) ; v1(8100,9275) 8105,9275 8115,9285 8850,9285 8865,9285 8885,9265 9130,9265 v1(9140,9275) ; v1(8105,8580) 8110,8580 8125,8595 8490,8595 8555,8530 11250,8530 v1(11260,8540) ; v1(8305,7600) v1(8650,7600) v1@8650,7605 ; v1(8310,8225) 8300,8215 8290,8215 7975,8215 7960,8215 7935,8190 7915,8190 7885,8160 ; v1(8310,8425) 8590,8425 8600,8415 v1(8600,8395) ; v1(8350,8910) 8545,8910 v1(8550,8910) ; v1(8380,9250) v1(8645,9250) ; v1(8405,8325) 8465,8325 8470,8330 8715,8330 8720,8325 10425,8325 10465,8365 10675,8365 v1(10680,8360) ; 8675,7970 9350,7970 v1(9365,7985) ; 8710,7920 8705,7920 ; v1(8715,9765) v1(11840,9765) ; 8735,7920 8765,7920 v1(8785,7920) ; v1(8745,8045) 8775,8075 8775,8080 8775,8155 8825,8205 v1(11170,8205) ; v1@8795,7920 8705,7920 ; v1@8970,7405 v1(8965,7405) ; v1@8970,7410 v1(8965,7405) ; 8995,8570 8585,8570 ; v1(9050,8580) 9040,8580 9030,8570 8585,8570 ; v1(9055,6755) 9100,6755 9155,6700 9270,6700 v1(9300,6700) ; v1(9365,8255) v1(10665,8255) ; v1(9545,7385) v1(9665,7385) ; v1(9595,7980) 9660,7980 9675,7995 10335,7995 10365,8025 v1(10455,8025) ; v1(9675,7245) 9760,7160 9785,7160 v1(9935,7160) ; 9849,8099 9855,8125 9855,8055 9815,8015 8965,8015 8950,8000 8745,8000 8515,8000 8340,8000 8250,8090 7605,8090 7550,8090 7525,8115 ; v1(9940,8420) 9955,8405 v1(10455,8405) ; v1(10140,8445) v1(10625,8445) ; v1(10570,8850) 10545,8825 10525,8805 9025,8805 8995,8835 8780,8835 v1(8775,8840) ; v1(10715,7185) 11290,7185 11335,7230 v1(11525,7230) ; v1(11215,9700) 11545,9700 v1(11565,9720) ; v1(11235,10050) v1(11735,10050) ; v1(11305,10015) 12050,10015 12065,10015 v1(12100,10050) ; v1(11310,10085) v1(12635,10085) ; v1(12230,7560) 12305,7560 12345,7520 ; v1(12230,9280) 12295,9280 12340,9325 12339,9322 ; 7885,8160 7880,8160 7885,8160 ; v1(8775,8840) 8785,8840 v1(8775,8840) ; v1(9645,8840) 9635,8850 v1(9645,8840) ; 7585,8235 7850,8235 7850,8500 7585,8500 7585,8235
  Bottom Layer, Bottom w12: 6018,9272 6064,9272 ; 6032,8562 6076,8562 ; 6086,9294 6088,9338 ; 6100,8586 6100,8629 ; 6108,9272 6153,9272 ; 6124,8562 6167,8562 ; 6242,8950 6278,8950 ; 8919,7800 8970,7800 ; 10516,7733 10567,7733 ; 10772,7738 10824,7738 ; 10840,7754 10840,7805 ; 10856,7738 10907,7738
  Bottom Layer, Bottom w14: v1(4650,7740) 5255,7740 5280,7715 ; v1(4825,8425) 4855,8425 4895,8465 5130,8465 v1(5165,8430) ; v1(4875,9370) v1(5075,9370) v1@5080,9370 ; v1(4879,9409) v1(4879,9516) ; v1(4935,9640) 4935,9635 4960,9610 v1(5145,9610) ; v1(6911,9546) 6911,9556 6930,9575 7430,9575 v1(7500,9505) ; v1(7350,7255) 7350,7270 ; v1(7660,10100) v1(8100,10100) ; 7834,10292 7840,10235 7925,10150 8140,10150 8150,10140 v1(8150,10135) ; 8000,10292 8005,10270 8005,10240 8065,10180 v1(8180,10180) ; 8100,6600 8100,6655 8110,6665 8465,6665 8525,6665 v1(8550,6690) ; v1(8300,9920) 8330,9950 8500,9950 8510,9940 8520,9940 v1(10190,9940) ; 12742,8187 12794,8187 12787,8179 12784,8174 ; 12742,8285 12794,8285 12787,8278 12784,8273 ; 12742,8384 12794,8384 12787,8377 12784,8372 ; 12747,7839 12800,7839 12800,7872 ; 12747,8006 12800,8006 ; 12747,8054 12800,8054 ; 12747,8101 12782,8101 ; 12755,7907 12750,7912 12747,7919 12747,7929 12750,7937 12755,7942 12762,7942 12767,7939 12770,7937 12772,7932 12777,7917 12780,7912 12782,7909 12787,7907 12792,7907 12797,7912 12800,7919 12800,7929 12797,7937 12792,7942 ; 12755,8054 12750,8049 12747,8044 12747,8036 12750,8031 12755,8026 12762,8024 12767,8024 12775,8026 12780,8031 12782,8036 12782,8044 12780,8049 12775,8054 ; 12755,8101 12750,8096 12747,8091 12747,8084 12750,8079 12755,8074 12762,8071 12767,8071 12775,8074 12780,8079 12782,8084 12782,8091 12780,8096 12775,8101 ; 12775,7839 12775,7859 ; 12752,8219 12784,8248 ; 12752,8219 12745,8224 12742,8231 12742,8236 12745,8243 12752,8248 12765,8251 12772,8251 12784,8248 ; 12752,8219 12765,8216 12772,8216 12784,8219 12792,8224 12794,8231 12794,8236 12792,8243 12784,8248 ; 12752,8317 12784,8347 ; 12752,8317 12745,8322 12742,8330 12742,8335 12745,8342 12752,8347 12765,8350 12772,8350 12784,8347 ; 12752,8317 12765,8315 12772,8315 12784,8317 12792,8322 12794,8330 12794,8335 12792,8342 12784,8347 ; 12752,8416 12784,8446 ; 12752,8416 12745,8421 12742,8429 12742,8434 12745,8441 12752,8446 12765,8448 12772,8448 12784,8446 ; 12752,8416 12765,8414 12772,8414 12784,8416 12792,8421 12794,8429 12794,8434 12792,8441 12784,8446 ; 12747,7887 12750,7889 12752,7887 12750,7884 12747,7887 ; 12747,7969 12747,7976 12750,7981 12755,7986 12762,7989 12767,7989 12775,7986 12780,7981 12782,7976 12782,7969 12780,7964 12775,7959 12767,7957 12762,7957 12755,7959 12750,7964 12747,7969
  Bottom Layer, Bottom w16: v1(4705,8370) 4730,8370 4735,8365 4885,8365 4925,8405 v1@4925,8435 ; v1(4965,7700) 4995,7700 v1(5130,7700) ; 10967,7006 11020,7006 10982,7044 10975,7056 10971,7063 10971,7071 10975,7078 10979,7082 10986,7086 11001,7086 11009,7082 11013,7078 11017,7071 11017,7067 ; 11168,7006 11168,7059 ; 11168,7018 11176,7010 11183,7006 11195,7006 11202,7010 11210,7018 11214,7029 11214,7037 11210,7048 11202,7056 11195,7059 11183,7059 11176,7056 11168,7048 ; 11236,7018 11244,7010 11251,7006 11263,7006 11270,7010 11278,7018 11282,7029 11282,7037 11278,7048 11270,7056 11263,7059 11251,7059 11244,7056 11236,7048 ; 11308,7006 11308,7059 ; 11308,7018 11316,7010 11323,7006 11335,7006 11342,7010 11350,7018 11354,7029 11354,7037 11350,7048 11342,7056 11335,7059 11323,7059 11316,7056 11308,7048 ; 11369,7059 11380,7059 11388,7056 11396,7048 11399,7037 ; 11399,7006 11399,7059 ; 11426,7018 11433,7010 11441,7006 11452,7006 11460,7010 11468,7018 11471,7029 11471,7037 ; 11494,7067 11498,7074 11505,7082 11513,7086 11528,7086 11536,7082 11543,7074 11547,7067 11551,7056 11551,7037 11547,7025 11543,7018 11536,7010 11528,7006 11513,7006 11505,7010 11498,7018 11494,7025 11494,7037 11513,7037 ; 11607,7146 11661,7146 11622,7185 11615,7196 11611,7204 11611,7211 11615,7219 11619,7223 11626,7226 11641,7226 11649,7223 11653,7219 11657,7211 11657,7207 ; 11627,7006 11627,7059 ; 11627,7018 11634,7010 11642,7006 11653,7006 11661,7010 11668,7018 11672,7029 11672,7037 11668,7048 11661,7056 11653,7059 11642,7059 11634,7056 11627,7048 ; 11695,7018 11702,7010 11710,7006 11721,7006 11729,7010 11737,7018 11740,7029 11740,7037 11737,7048 11729,7056 11721,7059 11710,7059 11702,7056 11695,7048 ; 11722,7146 11683,7226 11737,7226 ; 11881,6980 11881,7059 ; 11881,7018 11873,7010 11865,7006 11854,7006 11847,7010 11839,7018 11835,7029 11835,7037 11839,7048 11847,7056 11854,7059 11865,7059 11873,7056 11881,7048 ; 11905,7146 11935,7226 11966,7146 ; 11911,7006 11911,7059 ; 11916,7173 11954,7173 ; 11981,7207 11985,7215 11992,7223 12000,7226 12015,7226 12023,7223 12030,7215 12034,7207 12038,7196 12038,7177 12034,7165 12030,7158 12023,7150 12015,7146 12000,7146 11992,7150 11985,7158 11981,7165 11981,7177 12000,7177 ; 11991,7006 11991,7086 11956,7086 11945,7082 11941,7078 11937,7071 11937,7059 11941,7052 11945,7048 11956,7044 11991,7044 ; 12066,7048 12070,7056 12081,7059 12093,7059 12104,7056 12108,7048 12104,7040 12097,7037 12078,7033 12070,7029 12066,7021 12066,7018 12070,7010 12081,7006 12093,7006 12104,7010 12108,7018 ; 12135,7006 12135,7059 ; 12165,7006 12165,7059 ; 12165,7018 12172,7010 12180,7006 12191,7006 12199,7010 12207,7018 12210,7029 12210,7037 12207,7048 12199,7056 12191,7059 12180,7059 12172,7056 12165,7048 ; 12237,7006 12237,7086 12267,7006 12298,7086 12298,7006 ; 12377,7086 12377,7029 12381,7018 12388,7010 12400,7006 12407,7006 12419,7010 12426,7018 12430,7029 12430,7086 ; 12510,7006 12510,7086 12476,7086 12464,7082 12460,7078 12457,7071 12457,7059 12460,7052 12464,7048 12476,7044 12510,7044 ; 12536,7025 12540,7018 12548,7010 12555,7006 12570,7006 12578,7010 12586,7018 12589,7025 12593,7037 12593,7056 12589,7067 12586,7074 12578,7082 12570,7086 12555,7086 12548,7082 12540,7074 12536,7067 ; 11471,7037 11468,7048 11460,7056 11452,7059 11441,7059 11433,7056 11430,7052 11426,7044 11426,7037 11471,7037 ; 11764,7211 11809,7162 ; 11764,7211 11760,7192 11760,7181 11764,7162 11771,7150 11783,7146 11790,7146 11802,7150 11809,7162 ; 11764,7211 11771,7223 11783,7226 11790,7226 11802,7223 11809,7211 11813,7192 11813,7181 11809,7162 ; 11840,7211 11886,7162 ; 11840,7211 11836,7192 11836,7181 11840,7162 11847,7150 11859,7146 11866,7146 11878,7150 11886,7162 ; 11840,7211 11847,7223 11859,7226 11866,7226 11878,7223 11886,7211 11889,7192 11889,7181 11886,7162 ; 11092,7029 11096,7018 11104,7010 11111,7006 11123,7006 11130,7010 11138,7018 11142,7029 11142,7037 11138,7048 11130,7056 11123,7059 11111,7059 11104,7056 11096,7048 11092,7037 11092,7029 ; 11763,7029 11763,7037 11767,7048 11774,7056 11782,7059 11793,7059 11801,7056 11809,7048 11812,7037 11812,7029 11809,7018 11801,7010 11793,7006 11782,7006 11774,7010 11767,7018 11763,7029 ; 11907,7086 11911,7090 11915,7086 11911,7082 11907,7086 ; 12131,7086 12135,7090 12138,7086 12135,7082 12131,7086
  Bottom Layer, Bottom w18: 6087,7052 6138,7052 ; 8000,6600 8000,6660 8035,6695 8230,6695 8270,6735 8950,6735 8985,6700 v1(8985,6695) ; v1(8205,6730) 8250,6775 8745,6775 8765,6790 v1(8970,6790) ; v1(8380,6810) v1(8710,6810) ; 9525,7825 9580,7825 9590,7835 v1(9805,7835) ; v1(9560,6840) 9815,6840 9872,6783 9917,6783 ; v1(9795,10055) 9950,10055 9995,10100 10105,10100